# Altium PCB 0.3.PcbDoc
Units mil, origin at the board's own origin, x right, y up, seen from the top; angles counter-clockwise.
Board outline 6000 x 4000 mil, 2 copper layers (Top Layer, Bottom Layer); 38 components, 31 nets, 208 pads, 0 vias.
Unrouted connection lines stored in the file: 51.
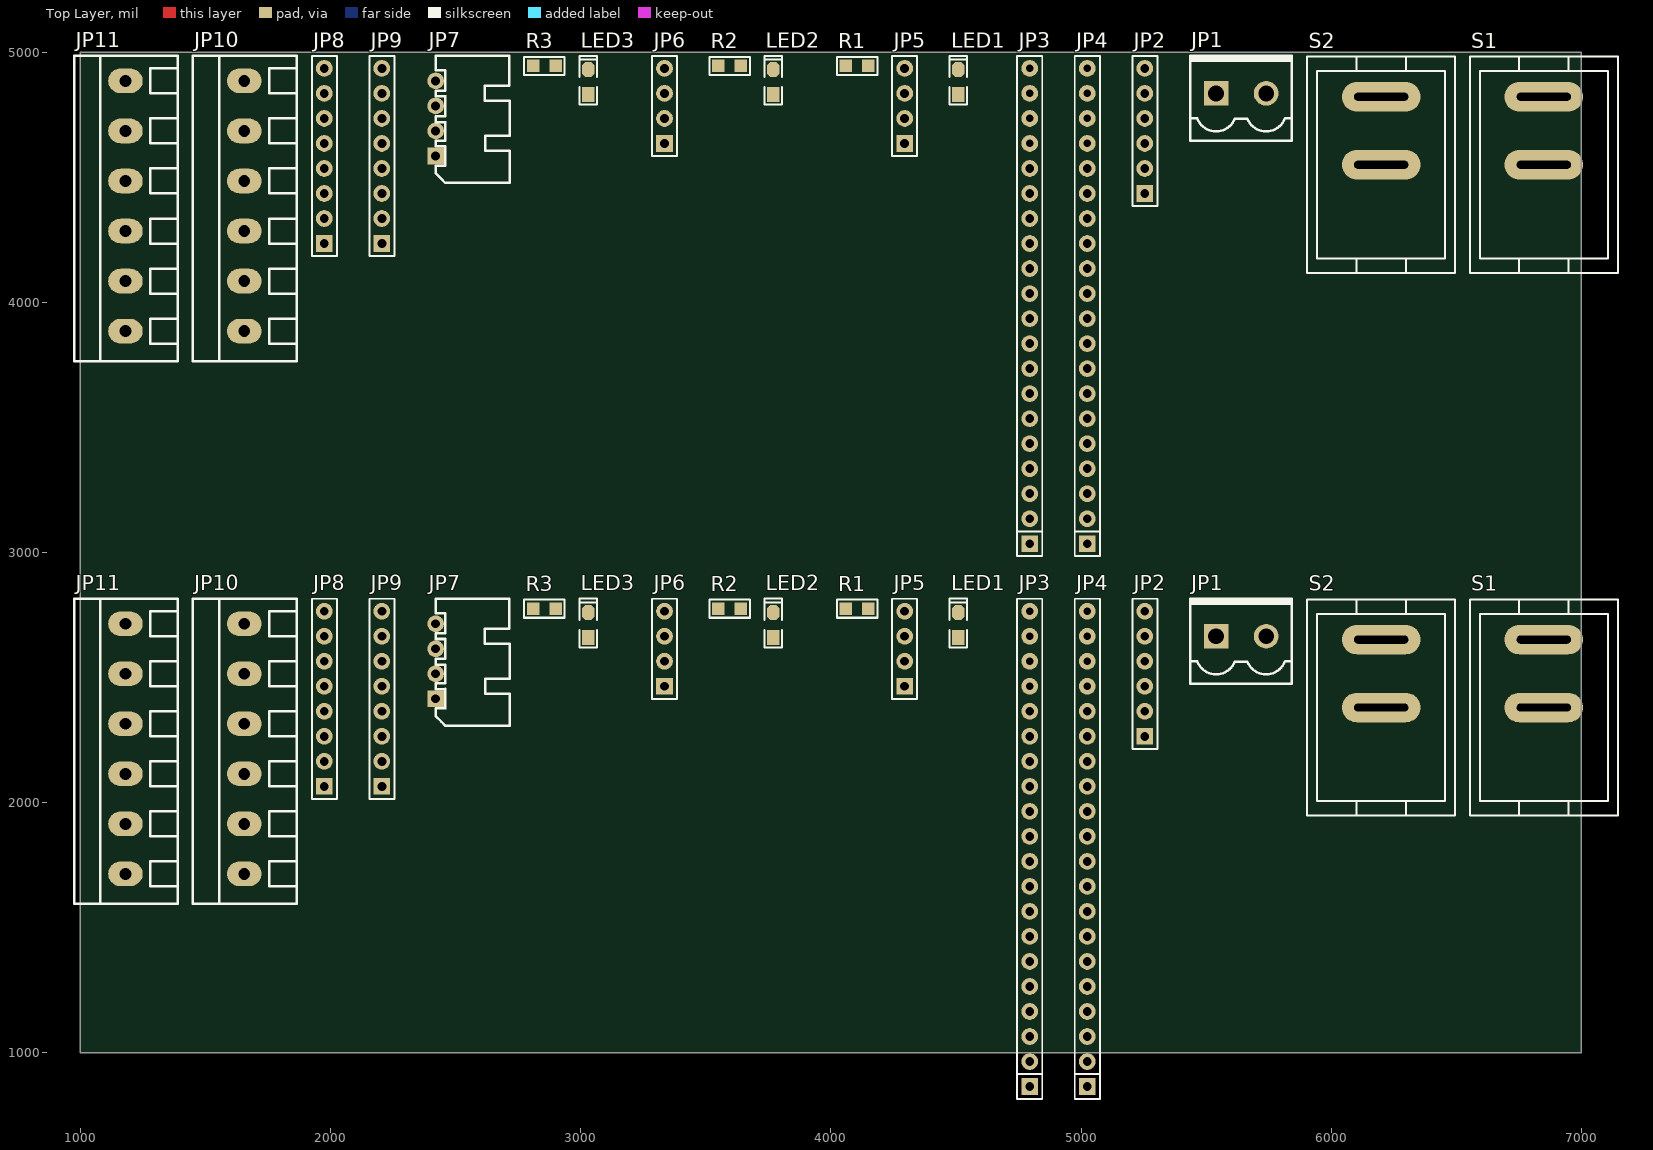
[diagram p0: Top Layer view]
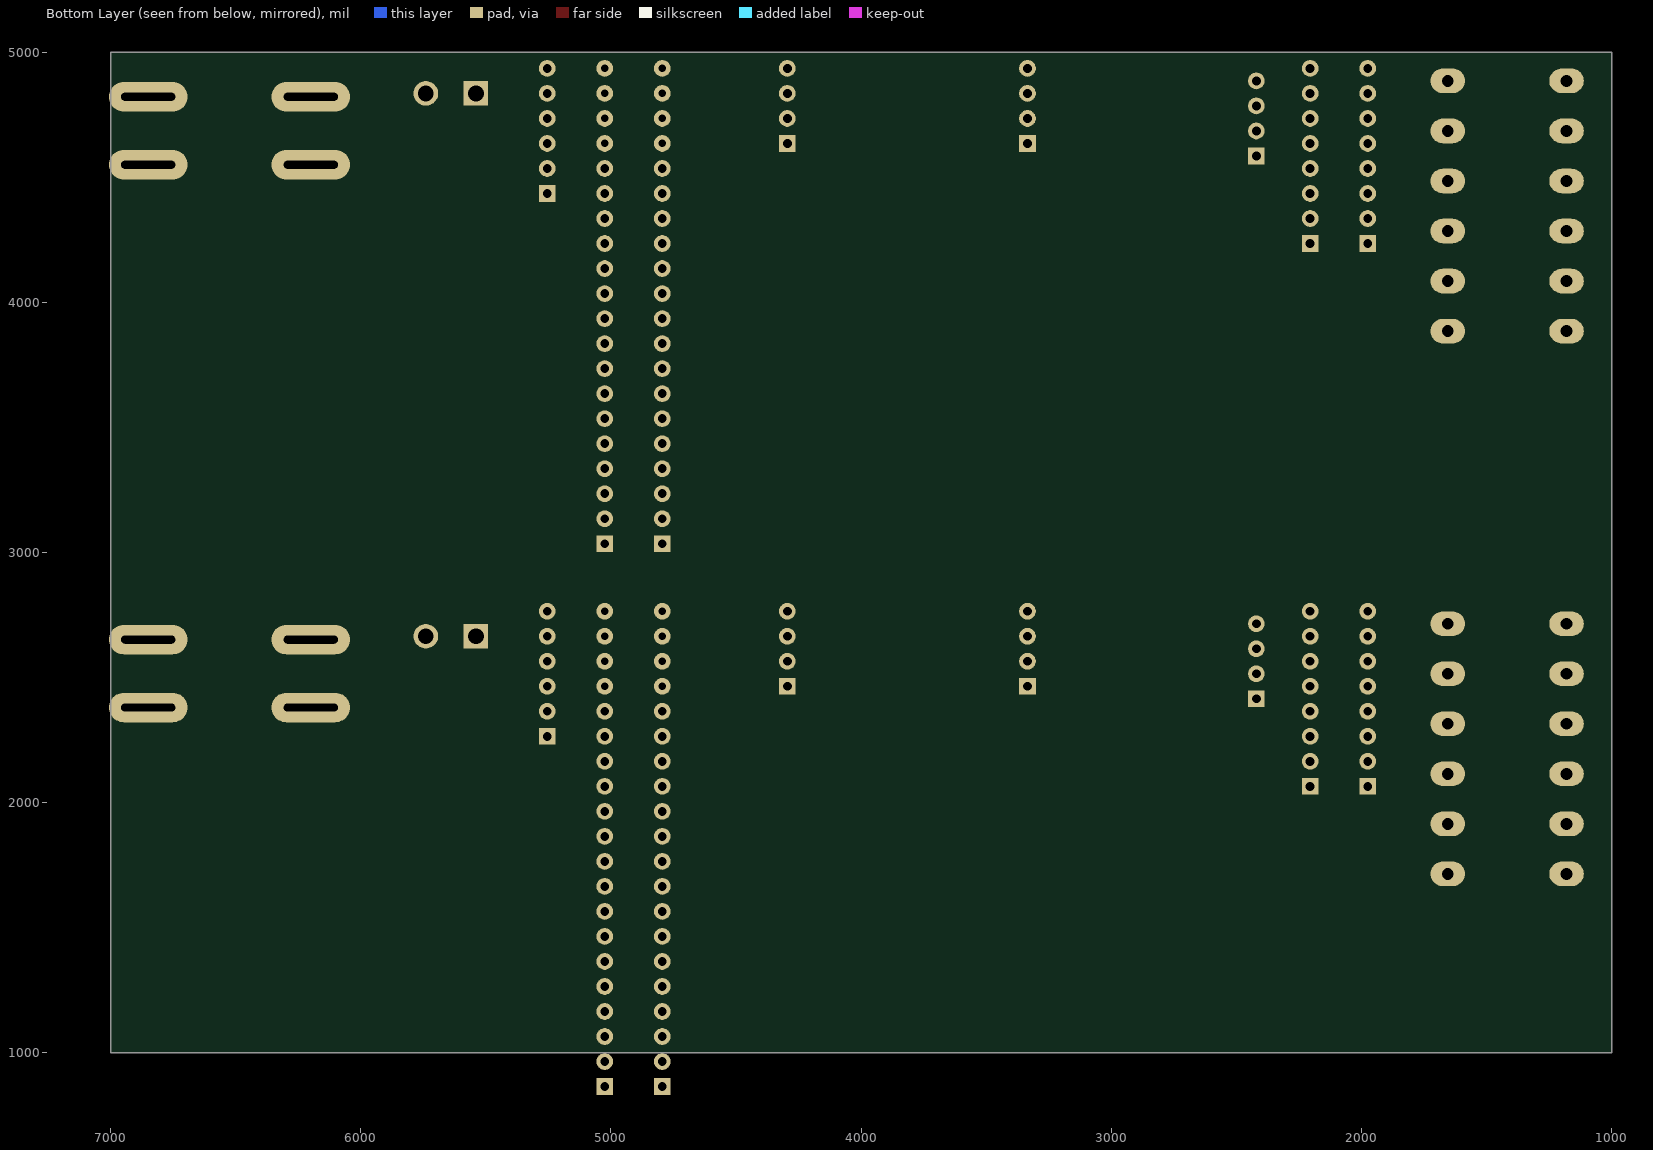
[diagram p1: Bottom Layer view, seen from below]

## Layer stack, top to bottom
Top Solder: solder mask 0.4, Solder Resist, Dk 3.5
Top Layer: signal copper 1.4
Dielectric 1: dielectric 12.6, FR-4, Dk 4.8
Bottom Layer: signal copper 1.4
Bottom Solder: solder mask 0.4, Solder Resist, Dk 3.5

## Board outline
1000,1000 7000,1000 7000,5000 1000,5000

## Design rules (kind name [scope] priority, off if disabled: settings)
Clearance [All] p1: gap=10 ignorepadtopadclearanceinfootprint=FALSE except(0: Arc-Hole Track-Hole SMDPad-Hole THPad-Hole Via-Hole Fill-Hole Poly-Hole Region-Hole Text-Hole)
PolygonConnect [All] p1: connectstyle=Relief reliefconductorwidth=10 reliefentries=4 polygonreliefangle="90 Angle" airgapwidth=10
RoomDefinition 0.3 [InComponentClass('0.3')] p1: confinementstyle=ConfineIn formatcopy=TRUE lockcomponents=FALSE outline 7045,1060 13235,1060 13235,5350 7045,5350
RoomDefinition 0.2 [InComponentClass('0.2')] p2: confinementstyle=ConfineIn formatcopy=TRUE lockcomponents=FALSE outline 965,805 7155,805 7155,5095 965,5095
RoutingVias [All] p1: holewidth=28 width=50 viastyle="Through Hole" minholewidth=28 minwidth=50 maxholewidth=28 maxwidth=50
SolderMaskExpansion [All] p1: expansion=4 istentingtop=FALSE
Width [All] p1: maxlimit=10 minlimit=10 preferedwidth=10
30 further rules are at their usual default settings.

## Classes and differential pairs
component class 0.3: JP1 JP2 JP3 JP4 JP5 JP6 JP7 JP8 JP9 JP10 JP11 LED1 LED2 LED3 R1 R2 R3 S1 S2
component class 0.2: JP1 JP2 JP3 JP4 JP5 JP6 JP7 JP8 JP9 JP10 JP11 LED1 LED2 LED3 R1 R2 R3 S1 S2

## Components (designator, comment, footprint, x,y, rotation, side; value= is the part's Value field where it differs from the comment)
JP1 "HDR-1X2" KF2EDGK5.08-LI-2P 5640,2665 r0 top
JP1 "HDR-1X2" KF2EDGK5.08-LI-2P 5640,4835 r0 top
JP2 "HDR-1X6" HDR2.54-M-LI-6P 5255,2515 r90 top
JP2 "HDR-1X6" HDR2.54-M-LI-6P 5255,4685 r90 top
JP3 "HDR-1X20" HDR2.54-M-LI-20P 4795,1815 r90 top
JP3 "HDR-1X20" HDR2.54-M-LI-20P 4795,3985 r90 top
JP4 "HDR-1X20" HDR2.54-M-LI-20P 5025,1815 r90 top
JP4 "HDR-1X20" HDR2.54-M-LI-20P 5025,3985 r90 top
JP5 "HDR-1X4" HDR2.54-M-LI-4P 4295,2615 r90 top
JP5 "HDR-1X4" HDR2.54-M-LI-4P 4295,4785 r90 top
JP6 "HDR-1X4" HDR2.54-M-LI-4P 3335,2615 r90 top
JP6 "HDR-1X4" HDR2.54-M-LI-4P 3335,4785 r90 top
JP7 "HDR-1X4" XH2.54-WI-4P 2420,2565 r90 top
JP7 "HDR-1X4" XH2.54-WI-4P 2420,4735 r90 top
JP8 "HDR-1X8" HDR2.54-M-LI-8P 1975,2415 r90 top
JP8 "HDR-1X8" HDR2.54-M-LI-8P 1975,4585 r90 top
JP9 "HDR-1X8" HDR2.54-M-LI-8P 2205,2415 r90 top
JP9 "HDR-1X8" HDR2.54-M-LI-8P 2205,4585 r90 top
JP10 "HDR-1X6" KF128-5.08-6P 1655,2215 r90 top
JP10 "HDR-1X6" KF128-5.08-6P 1655,4385 r90 top
JP11 "HDR-1X6" KF128-5.08-6P 1180,2215 r90 top
JP11 "HDR-1X6" KF128-5.08-6P 1180,4385 r90 top
LED1 "绿色" "LED 0805G" 4510,2710 r90 top
LED1 "绿色" "LED 0805G" 4510,4880 r90 top
LED2 "红色" "LED 0805G" 3770,2710 r90 top
LED2 "红色" "LED 0805G" 3770,4880 r90 top
LED3 "红色" "LED 0805G" 3030,2710 r90 top
LED3 "红色" "LED 0805G" 3030,4880 r90 top
R1 "500K" "R 0805_M" 4105,2775 r0 top
R1 "500K" "R 0805_M" 4105,4945 r0 top
R2 "500K" "R 0805_M" 3595,2775 r0 top
R2 "500K" "R 0805_M" 3595,4945 r0 top
R3 "500K" "R 0805_M" 2855,2775 r0 top
R3 "500K" "R 0805_M" 2855,4945 r0 top
S1 "KCD1-101" KCD1-101 6850,2380 r90 top
S1 "KCD1-101" KCD1-101 6850,4550 r90 top
S2 "KCD1-101" KCD1-101 6200,2380 r90 top
S2 "KCD1-101" KCD1-101 6200,4550 r90 top

## Footprints (in the part's own frame and the unit in brackets; to place one, negate y for a bottom-side part, rotate by r counter-clockwise, add the part's x,y. Pads: shape width x height; smd on the part's side, far side on the other; paste and mask are expansions set on the pad)
HDR2.54-M-LI-4P [mm] "排母，4脚  淘宝ID:黄晶宝石   店铺网址:https://shop463601444.taobao.com"
  rect 1.7x1.7 hole 0.9: 1(-3.81,0)
  round 1.7 hole 0.9: 2(-1.27,0) 3(1.27,0) 4(3.81,0)
  silkscreen extent -5.08,-1.27 5.08,1.27, body extent -5.08,-1.27 5.08,1.27, height 8.5
HDR2.54-M-LI-6P [mm] "排母，6脚  淘宝ID:黄晶宝石   店铺网址:https://shop463601444.taobao.com"
  rect 1.7x1.7 hole 0.9: 1(-6.35,0)
  round 1.7 hole 0.9: 2(-3.81,0) 3(-1.27,0) 4(1.27,0) 5(3.81,0) 6(6.35,0)
  silkscreen extent -7.62,-1.27 7.62,1.27, body extent -7.62,-1.27 7.62,1.27, height 8.5
HDR2.54-M-LI-8P [mm] "排母，8脚"
  rect 1.7x1.7 hole 0.9: 1(-8.89,0)
  round 1.7 hole 0.9: 2(-6.35,0) 3(-3.81,0) 4(-1.27,0) 5(1.27,0) 6(3.81,0) 7(6.35,0) 8(8.89,0)
  silkscreen extent -10.16,-1.27 10.16,1.27, body extent -10.16,-1.27 10.16,1.27, height 8.5
HDR2.54-M-LI-20P [mm] "排母，20脚"
  rect 1.7x1.7 hole 0.9: 1(-24.13,0)
  round 1.7 hole 0.9: 2(-21.59,0) 3(-19.05,0) 4(-16.51,0) 5(-13.97,0) 6(-11.43,0) 7(-8.89,0) 8(-6.35,0) 9(-3.81,0) 10(-1.27,0) 11(1.27,0) 12(3.81,0) 13(6.35,0) 14(8.89,0) 15(11.43,0) 16(13.97,0)
  round 1.7 hole 0.762: 17(16.51,0) 18(19.05,0) 19(21.59,0) 20(24.13,0)
  silkscreen extent -25.4,-1.27 25.4,1.27, body extent -25.4,-1.27 25.4,1.27, height 8.5
KCD1-101 [mm] "船型开关立式      淘宝ID:黄晶宝石"
  oval 3x8 hole 0.8 slot 5.5 at 90 deg: 1(0,0) 2(6.9,0)
  silkscreen extent -10.97,-7.52 10.97,7.52, body extent -10.95,-7.5 10.95,7.5, height 20.3
KF2EDGK5.08-LI-2P [mm] "立插端子"
  rect 2.5x2.5 hole 1.6: 1(-2.54,0)
  round 2.5 hole 1.6: 2(2.54,0)
  silkscreen extent -5.16,-4.83 5.13,3.81, body extent -5.08,-4.75 5.08,3.75, height 11.25
KF128-5.08-6P [mm] "螺钉式接线端子，脚距5.08mm"
  oval 2.5x3.5 hole 1.2: 1(-12.7,0) 2(-7.62,0) 3(-2.54,0) 4(2.54,0) 5(7.62,0) 6(12.7,0)
  silkscreen extent -15.75,-5.31 15.24,5.21, body extent -15.74,-5.3 15.24,5.2, height 14.15
"LED 0805G" [mil] "绿色0805LED                              淘宝ID:黄晶宝石"
  rect 60x50 smd: 1(-50,0)
  oct 60x50 smd: 2(50,0)
  silkscreen extent -90,-35 105,35, body extent -39,-25 39,25, height 32
"R 0805_M" [mil] "1/8W贴片电阻"
  rect 50x50 smd: 1(-45,0) 2(45,0)
  silkscreen extent -81,-36 81,36, body extent -39,-25 39,25, height 20
XH2.54-WI-4P [mm] "接插件，4P"
  rect 1.7x1.7 hole 0.9: 1(-3.81,0)
  round 1.7 hole 0.9: 2(-1.27,0) 3(1.27,0) 4(3.81,0)
  silkscreen extent -6.53,-7.53 6.35,0, body extent -6.31,-7.35 6.31,0.35, height 5.73

## Part data
JP1 JP1: library part "Header 2", "2P接插件", BOM名称=12V进入, 学习资源=www.ooocke.com, 版权归属=源创客
JP2 JP2 JP10 JP10 JP11 JP11: library part "Header 6", "6P接插件"
  JP2 JP2: BOM名称=HB-03, 学习资源=https://shop463601444.taobao.com, 版权归属="封装库来自淘宝 ID：黄晶宝石"
  JP10 JP10: BOM名称=左电机, 学习资源=www.ooocke.com, 版权归属=源创客
  JP11 JP11: BOM名称=右电机, 学习资源=www.ooocke.com, 版权归属=源创客
JP3 JP3 JP4 JP4: library part "Header 20", "20P接插件", 学习资源=https://shop463601444.taobao.com, 版权归属="封装库来自淘宝 ID：黄晶宝石"
  JP3 JP3: BOM名称=stm32-1
  JP4 JP4: BOM名称=stm32-2
JP5 JP5 JP6 JP6 JP7 JP7: library part "Header 4", "4P接插件", 学习资源=https://shop463601444.taobao.com, 版权归属="封装库来自淘宝 ID：黄晶宝石"
  JP5 JP5: BOM名称=USB-C
  JP6 JP6: BOM名称=USART2
JP8 JP8 JP9 JP9: library part "Header 8", "8P接插件", 学习资源=https://shop463601444.taobao.com, 版权归属="封装库来自淘宝 ID：黄晶宝石"
  JP8 JP8: BOM名称=TB6612接插件1
  JP9 JP9: BOM名称=TB6612接插件2
LED1 LED1 LED2 LED2 LED3 LED3: library part LED-SMD, "贴片LED", 学习资源=www.ooocke.com, 版权归属=源创客
  LED1 LED1: BOM名称=电源指示
  LED2 LED2 LED3 LED3: BOM名称=贴片LED
R1 R1 R2 R2 R3 R3: library part R, "贴片电阻", BOM名称=贴片电阻, 版权归属="来自淘宝 ID：黄晶宝石", 联系售后=https://shop463601444.taobao.com
  R2 R2: ComponentLink1Description="New link"
S1 S1 S2 S2: "1路单刀船型开关", BOM名称=1路单刀船型开关, 学习资源=www.ooocke.com, 版权归属="封装库来自淘宝 ID：黄晶宝石"

## Nets (pads, with @x,y where several pads share a name; then routed paths per layer and width w, separated by ;. In a path a pad name is that pad's centre, name@x,y a point inside that pad or via, vN(x,y) a via of type N, cw(c..) or ccw(c..) an arc to the next point about the centre after c; other vN are vias at no path point)
5V: JP2.5@5255,4835 JP2.6@5255,4935 JP3.1@4795,3035 JP6.3@3335,4835 JP7.1@2420,4585 JP9.7@2205,4835 JP10.4@1655,4485 JP11.4@1180,4485 LED1.1@4510,4830 S2.2@6200,4821.65
5V_IN: JP5.1@4295,4635 S2.1@6200,4550
12V: JP9.8@2205,4935 S1.2@6850,4821.65
12V_IN: JP1.1@5540,4835 S1.1@6850,4550
A01: JP9.5@2205,4635 JP10.1@1655,3885
A02: JP9.4@2205,4535 JP10.2@1655,4085
AIN1: JP4.8@5025,3735 JP8.3@1975,4435
AIN2: JP4.9@5025,3835 JP8.2@1975,4335
B01: JP9.3@2205,4435 JP11.1@1180,3885
B02: JP9.2@2205,4335 JP11.2@1180,4085
BIN1: JP4.10@5025,3935 JP8.5@1975,4635
BIN2: JP4.11@5025,4035 JP8.6@1975,4735
BRX: JP2.2@5255,4535 JP4.15@5025,4435
BTX: JP2.3@5255,4635 JP4.14@5025,4335
GND: JP1.2@5740,4835 JP2.4@5255,4735 JP3.19@4795,4835 JP5.4@4295,4935 JP6.4@3335,4935 JP7.2@2420,4685 JP8.8@1975,4935 JP9.1@2205,4235 JP9.6@2205,4735 JP10.3@1655,4285 JP11.3@1180,4285 R1.2@4150,4945 R2.2@3640,4945 R3.2@2900,4945
L2_B7: JP4.6@5025,3535 LED2.1@3770,4830
L3_B6: JP4.7@5025,3635 LED3.1@3030,4830
LA: JP3.5@4795,3435 JP10.6@1655,4885
LB: JP3.6@4795,3535 JP10.5@1655,4685
NetLED1_2: LED1.2@4510,4930 R1.1@4060,4945
NetLED2_2: LED2.2@3770,4930 R2.1@3550,4945
NetLED3_2: LED3.2@3030,4930 R3.1@2810,4945
PWMA-PA8: JP4.16@5025,4535 JP8.1@1975,4235
PWMB-PA0: JP4.5@5025,3435 JP8.7@1975,4835
RA: JP3.11@4795,4035 JP11.6@1180,4885
RB: JP3.12@4795,4135 JP11.5@1180,4685
SCL2: JP3.15@4795,4435 JP7.3@2420,4785
SDA2: JP3.16@4795,4535 JP7.4@2420,4885
STBY: JP4.4@5025,3335 JP8.4@1975,4535
USART2_RX: JP3.8@4795,3735 JP6.2@3335,4735
USART2_TX: JP3.7@4795,3635 JP6.1@3335,4635
pads on no net: JP1.1@5540,2665 JP1.2@5740,2665 JP2.1 JP2.2@5255,2365 JP2.3@5255,2465 JP2.4@5255,2565 JP2.5@5255,2665 JP2.6@5255,2765 JP3.1@4795,865 JP3.2 JP3.3 JP3.4 JP3.5@4795,1265 JP3.6@4795,1365 JP3.7@4795,1465 JP3.8@4795,1565 JP3.9 JP3.10 JP3.11@4795,1865 JP3.12@4795,1965 JP3.13 JP3.14 JP3.15@4795,2265 JP3.16@4795,2365 JP3.17 JP3.18 JP3.19@4795,2665 JP3.20 JP4.1 JP4.2 JP4.3 JP4.4@5025,1165 JP4.5@5025,1265 JP4.6@5025,1365 JP4.7@5025,1465 JP4.8@5025,1565 JP4.9@5025,1665 JP4.10@5025,1765 JP4.11@5025,1865 JP4.12 JP4.13 JP4.14@5025,2165 JP4.15@5025,2265 JP4.16@5025,2365 JP4.17 JP4.18 JP4.19 JP4.20 JP5.1@4295,2465 JP5.2 JP5.3 JP5.4@4295,2765 JP6.1@3335,2465 JP6.2@3335,2565 JP6.3@3335,2665 JP6.4@3335,2765 JP7.1@2420,2415 JP7.2@2420,2515 JP7.3@2420,2615 JP7.4@2420,2715 JP8.1@1975,2065 JP8.2@1975,2165 JP8.3@1975,2265 JP8.4@1975,2365 JP8.5@1975,2465 JP8.6@1975,2565 JP8.7@1975,2665 JP8.8@1975,2765 JP9.1@2205,2065 JP9.2@2205,2165 JP9.3@2205,2265 JP9.4@2205,2365 JP9.5@2205,2465 JP9.6@2205,2565 JP9.7@2205,2665 JP9.8@2205,2765 JP10.1@1655,1715 JP10.2@1655,1915 JP10.3@1655,2115 JP10.4@1655,2315 JP10.5@1655,2515 JP10.6@1655,2715 JP11.1@1180,1715 JP11.2@1180,1915 JP11.3@1180,2115 JP11.4@1180,2315 JP11.5@1180,2515 JP11.6@1180,2715 LED1.1@4510,2660 LED1.2@4510,2760 LED2.1@3770,2660 LED2.2@3770,2760 LED3.1@3030,2660 LED3.2@3030,2760 R1.1@4060,2775 R1.2@4150,2775 R2.1@3550,2775 R2.2@3640,2775 R3.1@2810,2775 R3.2@2900,2775 S1.1@6850,2380 S1.2@6850,2651.65 S2.1@6200,2380 S2.2@6200,2651.65